# Altium PCB PCB2.PcbDoc (part 2 of 2)
Units mil, origin at the board's own origin, x right, y up, seen from the top; angles counter-clockwise.
Board outline 2024.32 x 2031.2 mil, 4 copper layers (Top Layer, Internal Plane 1, Signal Layer 1, Bottom Layer), stack 46.586 mil thick; 94 components, 65 nets, 310 pads, 967 vias.
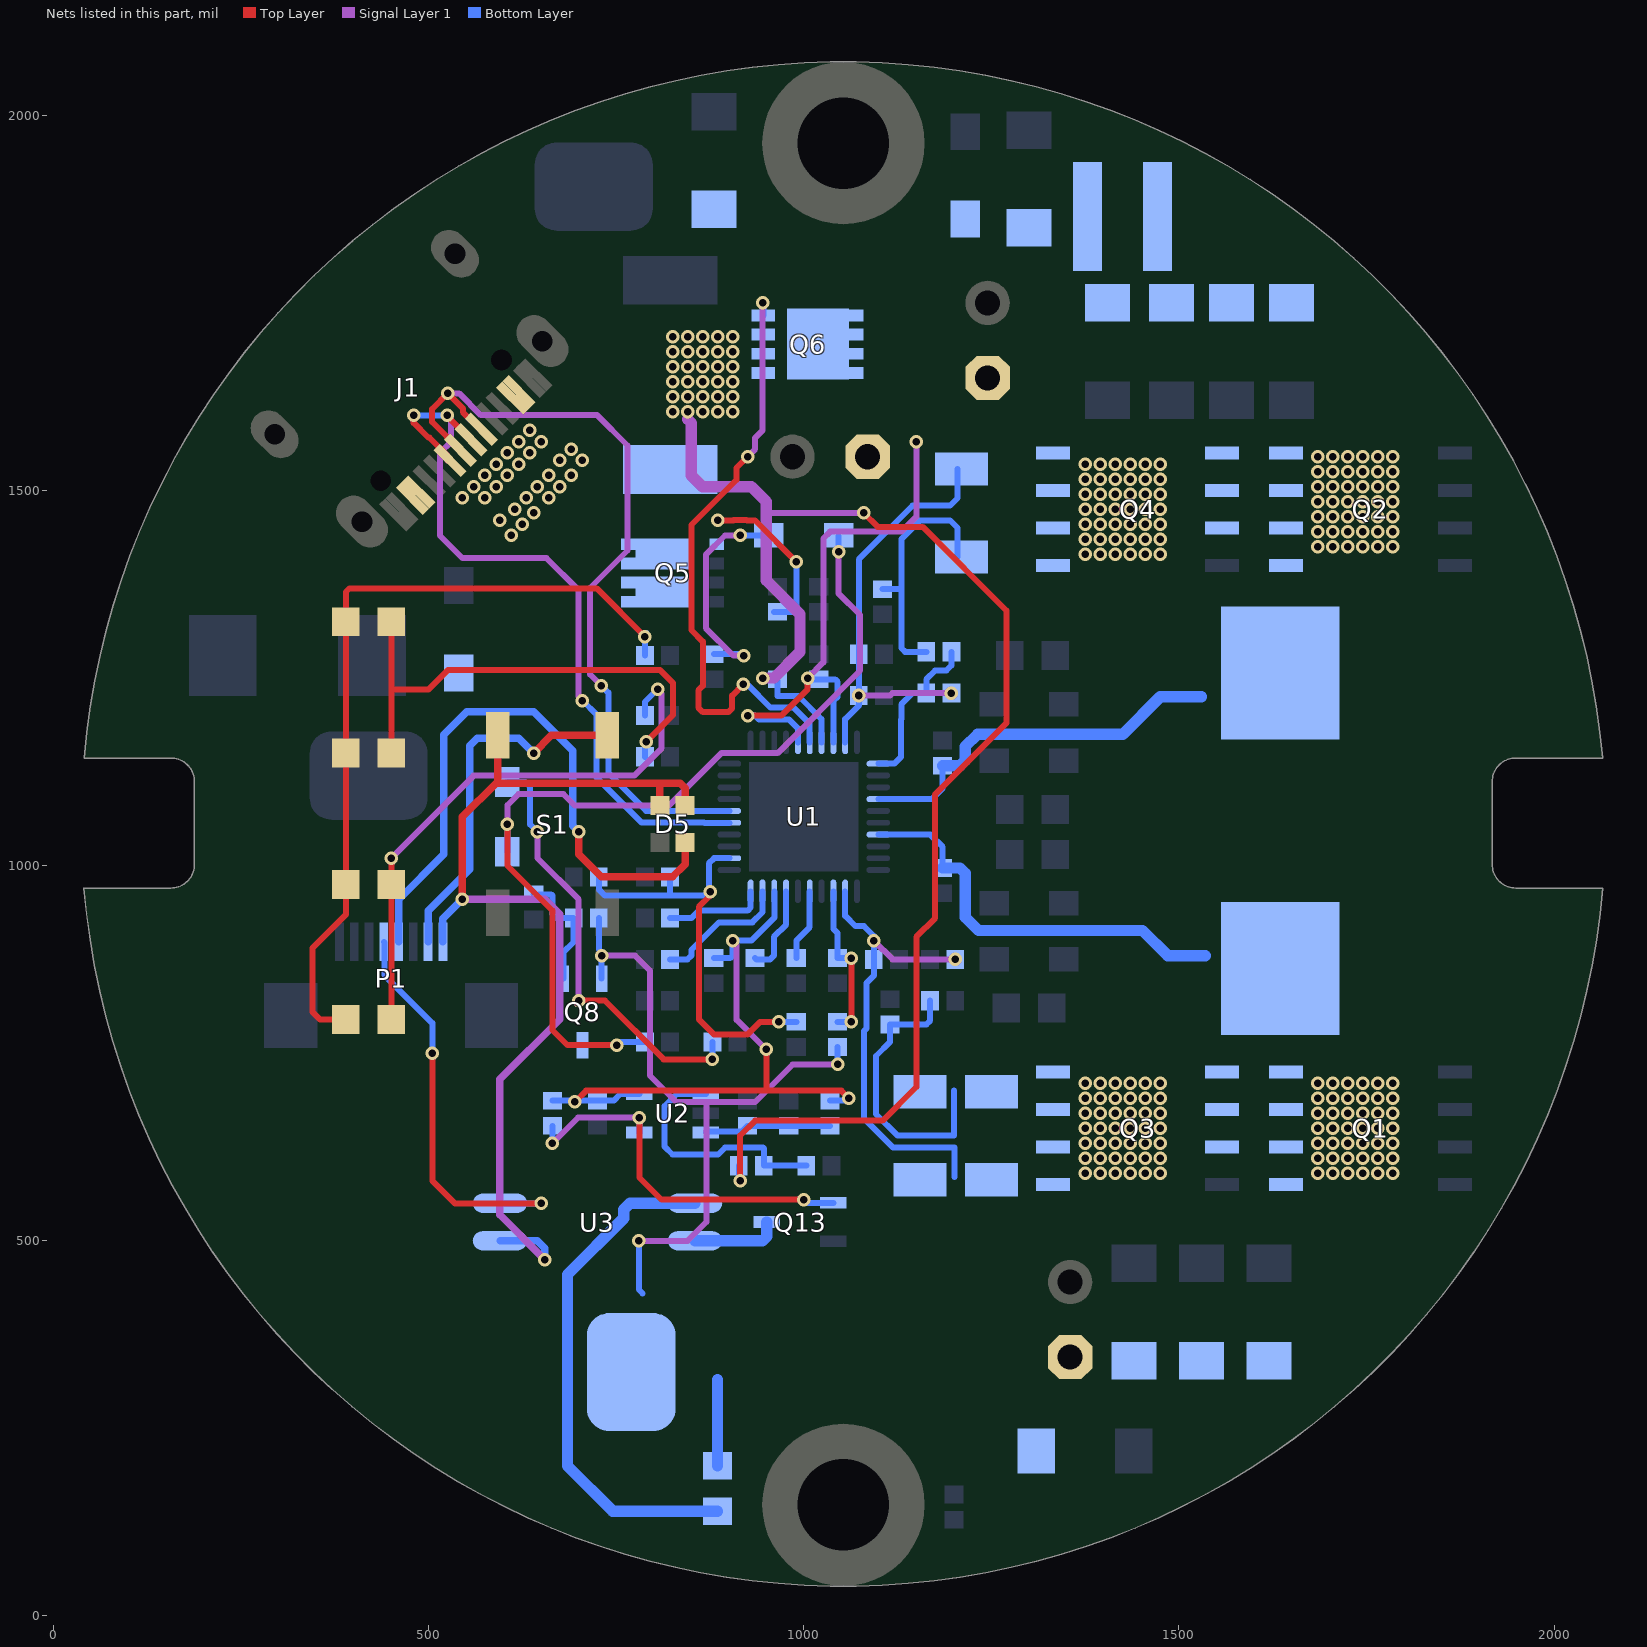
[diagram p4: the nets of this part, all layers, seen from the top]

## Via types
v1: diameter 18, hole 10, Top Layer to Bottom Layer, tented both sides, 967 vias

## Nets (pads, with @x,y where several pads share a name; then routed paths per layer and width w, separated by ;. In a path a pad name is that pad's centre, name@x,y a point inside that pad or via, vN(x,y) a via of type N, cw(c..) or ccw(c..) an arc to the next point about the centre after c; other vN are vias at no path point) (continued)
NetD6_A: D6.A D7.K D8.A D9.K R21.2 | length 1085
  Top Layer w8: D9.K@389.69,795 355,795 345,805 345,890 389.68,934.68 D8.A@389.68,975 D7.K@389.69,1150 389.69,1230 389.68,1320 389.68,1364.68 394.5,1369.5 723.77,1369.5 v1(788.27,1305)
  Bottom Layer w8: R21.2@788.27,1280 v1(788.27,1305) 788.27,1308.27 v1@790,1310
NetD6_K: D6.K D7.A R22.2 | length 676.7
  Top Layer w8: D7.A@450.32,1150 450.31,1235 ; D6.K@450.31,1320 450.31,1235 ; v1(790,1165) 825.5,1200.5 825.5,1243.49 808.49,1260.5 525.5,1260.5 500,1235 450.31,1235
  Bottom Layer w8: R22.2@788.27,1145 788.27,1163.27 v1(790,1165)
NetD8_K: D8.K D9.A R23.2 | length 759
  Top Layer w8: v1(450,1010) 450.31,1009.69 D8.K@450.31,975 D9.A@450.32,795
  Signal Layer 1 w8: v1(450,1010) 560,1120 773.99,1120 810.5,1156.51 810.5,1229.5 v1(805,1235)
  Bottom Layer w8: R23.2@788.27,1200 788.27,1218.27 v1(805,1235)
NetD12_1: D12.1 D13.1 Q8.3 R15.2 | length 1294.2
  Top Layer w8: v1(605,1055) 605,1000 665,940 665,780.71 685,760.71 v1(750.71,760.71)
  Signal Layer 1 w8: v1(605,1055) 605,1080.5 620,1095.5 679.5,1095.5 695,1080 820,1080 890,1150 965,1150 1075,1260 1075,1333.99 1046.46,1362.53 v1(1046.46,1418.54)
  Bottom Layer w8: D12.1@605,1018.54 v1(605,1055) ; Q8.3@705,760.71 v1(750.71,760.71) 755,765 R15.2@788.27,765 ; D13.1@1046.46,1440 v1(1046.46,1418.54) v1@1050,1415
NetD12_2: D12.2 R17.2 | length 581
  Top Layer w8: v1(700,820) 735,820 813.27,741.73 v1(878.27,741.73)
  Signal Layer 1 w8: v1(645,1045) 645,1010 700,955 v1(700,820)
  Bottom Layer w8: D12.2@605,1111.46 628.54,1111.46 635,1105 635,1055 v1(645,1045) ; R17.2@878.27,765 v1(878.27,741.73) v1@880,740
NetD13_2: D13.2 R33.2 | length 298.9
  Signal Layer 1 w8: v1(915,1440) 895,1440 869.5,1414.5 869.5,1316.51 906.01,1280 v1(920,1280)
  Bottom Layer w8: R33.2@880,1281.73 918.27,1281.73 v1(920,1280) ; v1(915,1440) D13.2@953.54,1440
NetQ5_1: Q5.1 R18.2 R32.1 | length 221
  Top Layer w8: v1(885,1460) 906.01,1460 906.51,1460.5 923.49,1460.5 923.99,1460 935,1460 v1(990,1405)
  Bottom Layer w8: R32.1@960,1338.27 983.27,1338.27 990,1345 v1(990,1405)
NetQ5_5: Q5.5 Q5.6
NetQ8_1: Q8.1 R13.1 R14.2 | length 167.5
  Bottom Layer w8: R14.2@640,961.73 663.27,961.73 665,960 665,935 670,930 R13.1@693.27,930 693.27,898.27 679.41,884.41 Q8.1@679.41,849.29
NetQ13_1: Q13.1 R25.1 U2.4 | length 526.6
  Top Layer w8: v1(780.71,664.29) 780.71,584.29 810,555 v1(1000,555)
  Signal Layer 1 w8: v1(665,630) 699.29,664.29 v1(780.71,664.29)
  Bottom Layer w8: v1(665,630) R25.1@665,653.27 ; v1@780,665 v1(780.71,664.29) U2.4@780.71,644.41 ; v1(1000,555) 1004.41,550.59 Q13.1@1039.29,550.59
NetQ13_3: Q13.3 U3.2 | length 117.4
  Bottom Layer w15: U3.2@854.92,500 945,500 950.71,505.71 Q13.3@950.71,525
NetR24_2: R24.2 R26.2 U2.1 | length 336.1
  Bottom Layer w8: U2.1@869.29,695.59 830.59,695.59 814.5,679.5 814.5,625.5 825,615 885.74,615 895.04,624.3 945.7,624.3 946.73,623.27 R24.2@946.73,600 R26.2@1003.27,600
NetR29_2: R29.2 U3.1 | length 696.1
  Bottom Layer w15: U3.1@854.92,550 768.37,550 760,541.63 760,530 685,455 685,200 745.32,139.68 R29.2@885,139.68
NTC: C19.2 R12.2 R20.1 U1.32 | length 587.8
  Top Layer w8: v1(875,965) 875,960 860,945 860,795 880,775 925,775 941.73,791.73 v1(966.73,791.73)
  Bottom Layer w8: C19.2@726.73,985 726.73,968.27 735,960 875,960 873.54,961.46 873.54,1003.04 880.38,1009.88 U1.32@900.79,1009.88 ; 821.73,963.27 R12.2@821.73,985 ; v1@965,790 v1(966.73,791.73) R20.1@990,791.73
PCIN: Q4.5 Q4.6 Q4.7 Q4.8 R3.2 R5.2 R34.2 | length 334.1
  Bottom Layer w8: R5.2@1105,1368.46 1128.51,1368.46 1130,1369.96 ; R34.2@1163.27,1285 1135.04,1285 1130.04,1290 1130.04,1299.33 1130,1299.38 1130,1369.96 ; R3.2@1205,1411.34 1205,1450 1195,1460 1155,1460 1130.04,1435.04 1130.04,1370 1130,1369.96
  other v1: 1375,1415 1395,1415 1415,1415 1435,1415 1455,1415 1475,1415 1375,1435 1395,1435 1415,1435 1435,1435 1455,1435 1475,1435 1375,1455 1395,1455 1415,1455 1435,1455 1455,1455 1475,1455 1375,1475 1395,1475 1415,1475 1435,1475 1455,1475 1475,1475 1375,1495 1395,1495 1415,1495 1435,1495 1455,1495 1475,1495 1375,1515 1395,1515 1415,1515 1435,1515 1455,1515 1475,1515 1375,1535 1395,1535 1415,1535 1435,1535 1455,1535 1475,1535
PCON: Q3.5 Q3.6 Q3.7 Q3.8 R8.1 R30.1 R31.1 R36.2 | length 385
  Bottom Layer w8: R36.2@1168.27,820 1168.27,793.27 1163.27,788.27 R8.1@1115,788.27 1115,765 1096.25,746.25 1096.25,668.75 1125,640 1200,640 1200,700
  other v1: 1375,590 1395,590 1415,590 1435,590 1455,590 1475,590 1375,610 1395,610 1415,610 1435,610 1455,610 1475,610 1375,630 1395,630 1415,630 1435,630 1455,630 1475,630 1375,650 1395,650 1415,650 1435,650 1455,650 1475,650 1375,670 1395,670 1415,670 1435,670 1455,670 1475,670 1375,690 1395,690 1415,690 1435,690 1455,690 1475,690 1375,710 1395,710 1415,710 1435,710 1455,710 1475,710
RBATNUM: R10.2 U1.27 | length 120.4
  Bottom Layer w8: R10.2@935,876.73 936.73,875 955,875 960,880 960,905 976.38,921.38 U1.27@976.38,965.79
RLED: D5.4 P1.4 | length 838.9
  Top Layer w10: v1(700,1045) 700,1015 730,985 825,985 841.73,1001.73 D5.4@841.73,1030.86
  Bottom Layer w10: P1.4@459.84,898.31 459.84,954.84 520,1015 520,1174.5 550.5,1205 640.15,1205 692,1153.15 692,1053 v1(700,1045)
RPSET: R9.2 U1.29 | length 181.6
  Bottom Layer w8: R9.2@821.73,875 845,875 850,880 850,887.6 886.9,924.5 931.42,924.5 944.94,938.02 944.94,965.72 U1.29@944.88,965.79
RVSET: R11.2 U1.30 | length 134.9
  Bottom Layer w8: R11.2@821.73,930 850,930 860,940 925,940 929.13,944.13 U1.30@929.13,965.79
SGND: D5.1 D5.2 P1.1 S1.3 U3.3 | length 1350.9
  Top Layer w10: v1(545,955) 545,1065 590,1110 ; S1.3@592.17,1173.58 592.17,1112.17 590,1110 ; D5.2@808.27,1079.61 808.27,1106.73 805,1110 ; D5.1@841.73,1079.61 841.73,1103.27 835,1110 805,1110 ; 590,1110 805,1110
  Signal Layer 1 w10: v1(545,955) 655,955 675,935 675,795 595,715 595,535 v1(655,475)
  Bottom Layer w10: P1.1@518.9,898.31 518.9,928.9 v1(545,955) ; U3.3@595.08,500 645,500 655,490 v1(655,475)
SW1: C7.1 L2.1 Q2.5 Q2.6 Q2.7 Q2.8 Q4.1 Q4.2 Q4.3 U1.14 | length 516.1
  Bottom Layer w8: U1.14@1099.21,1088.62 1099.33,1088.5 1170.5,1088.5 1185,1103 C7.1@1185,1133.27
  Bottom Layer w15: C7.1@1185,1133.27 1208.27,1133.27 1215,1140 1215,1158.69 1231.31,1175 1425,1175 1475,1225 1530,1225
  other v1: 1685,1425 1705,1425 1725,1425 1745,1425 1765,1425 1785,1425 1685,1445 1705,1445 1725,1445 1745,1445 1765,1445 1785,1445 1685,1465 1705,1465 1725,1465 1745,1465 1765,1465 1785,1465 1685,1485 1705,1485 1725,1485 1745,1485 1765,1485 1785,1485 1685,1505 1705,1505 1725,1505 1745,1505 1765,1505 1785,1505 1685,1525 1705,1525 1725,1525 1745,1525 1765,1525 1785,1525 1685,1545 1705,1545 1725,1545 1745,1545 1765,1545 1785,1545
SW2: C9.1 L2.2 Q1.5 Q1.6 Q1.7 Q1.8 Q3.1 Q3.2 Q3.3 U1.17 | length 553.6
  Bottom Layer w8: U1.17@1099.21,1041.38 1168.62,1041.38 1185,1025 C9.1@1185,996.73
  Bottom Layer w15: C9.1@1185,996.73 1208.27,996.73 1215,990 1215,931.31 1232.64,913.66 1451.34,913.66 1485,880 1535,880
  other v1: 1685,590 1705,590 1725,590 1745,590 1765,590 1785,590 1685,610 1705,610 1725,610 1745,610 1765,610 1785,610 1685,630 1705,630 1725,630 1745,630 1765,630 1785,630 1685,650 1705,650 1725,650 1745,650 1765,650 1785,650 1685,670 1705,670 1725,670 1745,670 1765,670 1785,670 1685,690 1705,690 1725,690 1745,690 1765,690 1785,690 1685,710 1705,710 1725,710 1745,710 1765,710 1785,710
TKEY: P1.2 S1.1 | length 489.8
  Top Layer w10: v1(640,1150) 663.58,1173.58 S1.1@737.83,1173.58
  Bottom Layer w10: P1.2@499.21,898.31 499.21,939.62 555,995.41 555,1160 565,1170 620,1170 v1(640,1150)
TPC_PEAK: C26.2 R34.1 U1.11 | length 221.5
  Bottom Layer w8: U1.11@1099.21,1135.87 1120.57,1135.87 1129.7,1145 1129.7,1195 1130.04,1195.34 1130.04,1215.04 1145,1230 C26.2@1163.27,1230 1163.27,1248.27 1175,1260 1190,1260 1196.73,1266.73 R34.1@1196.73,1285
USBDM: J1.A7 J1.B7 U1.36 | length 1085.7
  Top Layer w8: J1.A7@542.43,1553.7 542.31,1553.7 504.5,1591.51 504.5,1608.49 v1(525.5,1629.5) 545.5,1609.5 545.5,1604.5 568.46,1581.54 J1.B7@570.26,1581.54
  Signal Layer 1 w8: v1(525.5,1629.5) 540.5,1629.5 569.5,1600.5 724.5,1600.5 765,1560 765,1420 715,1370 715,1255 v1(730,1240)
  Bottom Layer w8: v1(730,1240) 739.5,1230.5 739.5,1123.58 789.96,1073.12 873.32,1073.12 873.57,1072.87 U1.36@900.79,1072.87
USBDP: J1.A6 J1.B6 U1.35 | length 1018.4
  Top Layer w8: v1(480,1600) 480,1590 499.45,1570.55 500.96,1570.55 525.3,1546.21 525.3,1539.77 J1.B6@528.5,1539.77 ; v1(525,1600) 525,1598.95 J1.A6@556.34,1567.61
  Signal Layer 1 w8: v1(525,1600) 530,1595 530,1565 515,1550 515,1440 545,1410 656.92,1410 699.5,1367.42 699.5,1225.5 v1(705,1220)
  Bottom Layer w8: v1(480,1600) v1(525,1600) ; v1(705,1220) 724,1201 724,1117.16 783.54,1057.62 866.9,1057.62 867.4,1057.13 U1.35@900.79,1057.13
VBAT: C10.2 C11.2 C12.1 C13.2 C14.2 C15.2 C27.1 FB1.2 pad.3@770,325 Q8.2 R13.2 R29.1 R30.2 R31.2 U1.22 | length 1676.1
  Signal Layer 1 w8: v1(730.59,880) 775,880 795,860 795,720 830,685 870,685 ; v1(780,500) 845,500 870,525 870,685 ; v1(1045,735) 985,735 935,685 870,685 ; v1(1093.27,900) 1118.27,875 v1(1201.73,875)
  Bottom Layer w8: R13.2@726.73,930 726.73,888.27 730.59,884.41 v1(730.59,880) Q8.2@730.59,849.29 ; v1(780,500) 780,435 785,430 ; v1(1045,735) FB1.2@1045,758.27 ; U1.22@1055.12,965.79 1055.12,932.96 1068.58,919.5 1080,919.5 1093.27,906.23 v1(1093.27,900) C15.2@1093.27,875 1093.27,853.27 1083.77,843.77 1083.77,783.24 1080,779.47 1080,698.99 1080.5,698.49 1080.5,662.58 1118.58,624.5 1200.5,624.5 1200.5,585
  Bottom Layer w15: R29.1@885,200.31 885,315
VBIN: C16.2 FB1.1 U1.23 | length 217.8
  Top Layer w8: v1(1063.27,791.73) v1(1063.27,876.73)
  Bottom Layer w8: U1.23@1039.37,965.79 1039.37,915.63 1045,910 C16.2@1045,876.73 v1(1063.27,876.73) v1@1065,875 ; FB1.1@1045,791.73 v1(1063.27,791.73) v1@1065,790
VBULK: C22.2 C23.2 C24.1 D11.2 L1.2 Q6.5 Q6.6 Q6.7 Q6.8
VBUS: C2.2 C3.2 C4.1 C5.2 C6.2 C8.2 C26.1 C30.2 L1.1 R3.1 R4.2 U1.5 U1.8 U1.9 | length 1338.9
  Top Layer w8: v1(925,1200) 970,1200 1005,1235 v1(1005,1250)
  Signal Layer 1 w8: v1(1005,1250) 1025.96,1270.96 1025.96,1427.03 1026.03,1427.11 1026.03,1436.03 1035,1445 1130,1445 1150,1465 v1(1150,1565) ; v1(1073.27,1226.73) 1115,1226.73 1118.27,1230 v1(1196.73,1230)
  Bottom Layer w8: v1(925,1200) 935,1200 940,1195 980,1195 992.13,1182.87 U1.5@992.13,1164.21 ; v1(1005,1250) 1006.73,1248.27 C8.2@1020,1248.27 1041.73,1248.27 1045,1245 1045,1225 1039.37,1219.37 U1.8@1039.37,1164.21 ; U1.9@1055.12,1164.21 1055.12,1195.12 1073.27,1213.27 v1(1073.27,1226.73) C2.2@1073.27,1281.73 1073.27,1408.27 1145,1480 1195,1480 1205,1490 R3.1@1205,1528.66
VBUSG: Q6.4 U1.6 | length 827.5
  Top Layer w8: v1(919.5,1241.56) 904.5,1226.56 904.5,1209.5 899.5,1204.5 865.5,1204.5 859.5,1210.5 859.5,1233.49 865.5,1239.49 865.5,1298.59 850,1314.09 850,1453.99 910,1513.99 910,1530 v1(925,1545)
  Signal Layer 1 w8: v1(925,1545) 935,1555 935,1570 945,1580 v1(945,1750)
  Bottom Layer w8: v1(919.5,1241.56) 924.45,1241.56 955.51,1210.5 986.42,1210.5 1007.87,1189.05 U1.6@1007.87,1164.21 ; v1(945,1750) 945.94,1749.06 Q6.4@945.94,1733.39
VCC5V: C18.1 U1.25 | length 96.5
  Bottom Layer w8: C18.1@990,876.73 990,900 1007.87,917.87 U1.25@1007.87,965.79
VCCIO: C17.1 C20.2 R25.2 R27.1 U1.28 U2.5 | length 884.5
  Top Layer w8: v1(695,685) 710,700 950,700 ; v1(950,755) 950,700 ; v1(1060,690) 1050,700 950,700
  Signal Layer 1 w8: v1(905,900) 910.5,894.5 910.5,794.5 v1(950,755)
  Bottom Layer w8: R25.2@665,686.73 C20.2@725,686.73 746.73,686.73 755.59,695.59 U2.5@780.71,695.59 ; C17.1@880,876.73 901.73,876.73 905,880 v1(905,900) ; v1@910,900.04 930.04,900.04 960.63,930.63 U1.28@960.63,965.79 ; R27.1@1035,686.73 1056.73,686.73 v1(1060,690)
VINOKN: P1.5 U3.4 | length 557.5
  Top Layer w8: v1(505,750) 505,580 535,550 v1(650,550)
  Bottom Layer w8: P1.5@440.16,898.31 440.97,897.49 440.97,854.03 505,790 v1(505,750) ; U3.4@595.08,550 v1(650,550)
VREF: C21.2 R27.2 R28.2 U2.3 | length 169.4
  Bottom Layer w8: U2.3@869.29,644.41 870.38,645.5 917.23,645.5 C21.2@925,653.27 R28.2@980,653.27 R27.2@1035,653.27
VTYPEC: C1.2 D10.2 J1.A4 J1.A9 J1.B4 J1.B9 Q6.1 Q6.2 Q6.3 R24.1 U1.7 | length 2028.8
  Top Layer w8: v1(915,580) 915,640 935,660 1105,660 1150,705 1150,905 1175,930 1175,1095 1270,1190 1270,1340 1158.37,1451.63 1098.37,1451.63 v1(1080,1470)
  Signal Layer 1 w8: 950,1470 v1(1080,1470)
  Signal Layer 1 w15: 845,1595 850,1590 850,1520 865,1505 930,1505 950,1485 950,1470 ; v1(945,1250) 960,1250 995,1285 995,1335 950,1380 950,1477.5
  Bottom Layer w8: R24.1@913.27,600 913.27,581.73 v1(915,580) ; v1(945,1250) 946.73,1248.27 C1.2@965,1248.27 965,1226 992.84,1226 1023.62,1195.22 U1.7@1023.62,1164.21
  other v1: 610,1440 625,1455 595,1460 640,1470 615,1475 545,1490 575,1490 630,1490 660,1490 560,1505 590,1505 645,1505 675,1505 575,1520 605,1520 660,1520 690,1520 590,1535 620,1535 675,1540 705,1540 605,1550 635,1550 690,1555 620,1565 650,1565 635,1580 825,1605 845,1605 865,1605 885,1605 905,1605 825,1625 845,1625 865,1625 885,1625 905,1625 825,1645 845,1645 865,1645 885,1645 905,1645 825,1665 845,1665 865,1665 885,1665 905,1665 825,1685 845,1685 865,1685 885,1685 905,1685 825,1705 845,1705 865,1705 885,1705 905,1705
pads on no net: J1.0 J1.A8 J1.B8 S1.2 S1.4 U1.1 U1.2 U1.3 U1.4 U1.24 U1.40

## Polygon pours and split planes (outlines as drawn)
GND on Bottom Layer "Component Side-No Net 1" (solid, remove dead copper, pour order 53): -135,2110 1935,2110 2010,2185 2225,1970 2225,360 2225,315 1715,-195 1650,-130 -560,-130
GND on Bottom Layer "Component Side-No Net 1" (solid, remove dead copper, pour order 50): 1660,1795 2090,1795 2130,1835 2200,1765 2200,555 2200,505 2125,430 2095,400 1662.65,400
SW2 on Bottom Layer "Component Side-No Net 1" (solid, remove dead copper, pour order 47): 1500,530 1505,535 1505,790 1505,950 1520,965 1525,970 1715,970 1725,970 1735,960 1755,940 1755,840 1795,800 1805,790 1805,505 1550,505
SW1 on Bottom Layer "Component Side-No Net 1" (solid, remove dead copper, pour order 44): 1517.35,1572.65 1525,1565 1817.65,1565 1817.65,1206.83 1810.41,1199.59 1795.81,1185 1770,1185 1745,1185 1735,1175 1735,1165 1735,1155 1520,1155 1520,1562.35 1517.35,1565
GND on Bottom Layer "Component Side-No Net 1" (solid, remove dead copper, pour order 48): 1810,1565 2130,1565 2130,935 2150,915 2125,890 1810,890
VTYPEC on Bottom Layer "Component Side-No Net 1" (solid, remove dead copper, pour order 56): 815,1715 965,1715 965,1580 815,1580
GND on Bottom Layer "Component Side-No Net 1" (solid, remove dead copper, pour order 58): 1265,539.19 1634.19,539.19 1725,630 1735,620 2200,620 2200,15 2295,-80 2160,-215 1250,-215
VTYPEC on Bottom Layer "Component Side-No Net 1" (solid, remove dead copper, pour order 62): 520,1485 590,1415 610,1425 757.35,1572.35 965,1572.35 965,1715 715,1715 700,1700 700,1660
SW1 on Bottom Layer "Component Side-No Net 1" (solid, remove dead copper, pour order 78): 1490,1505 1590,1505 1620,1475 1615,1470 1615,1325 1480,1325 1475,1320
SW2 on Bottom Layer "Component Side-No Net 1" (solid, remove dead copper, pour order 79): 1507.35,685 1515,677.35 1515,550 1545,550 1570,525 1620,525 1620,715 1615,720
PCON on Bottom Layer "Component Side-No Net 1" (solid, remove dead copper, pour order 59): 1110,745 1230,745 1265,780 1360,780 1385,805 1390,810 1510,810 1510,617.55 1521.65,605.91 1522.06,605.49 1522.06,537.07 1302.93,537.07 1295,545 1295,570 1295,655 1290,660 1285,665 1235,665 1120,665 1110,675
VBAT on Bottom Layer "Component Side-No Net 1" (solid, remove dead copper, pour order 60): 1257.6,167.17 1154.77,270 1040,270 935,245 935,235 835,235 705,235 705,445 725,465 730,470 740,480 885,480 890,485 1055,485 1655,485 1705,435 1720,420 1720,150
VBAT on Bottom Layer "Component Side-No Net 1" (solid, remove dead copper, pour order 61): 1265,479.31 1265,505 1295,535 1295,615 1070,615 1060,605 1060,455 1245,455 1267.24,432.76
PCIN on Bottom Layer "Component Side-No Net 1" (solid, remove dead copper, pour order 64): 1185,1445 1160,1445 1155,1445 1140,1430 1140,1350 1145,1345 1175,1345 1190,1345 1200,1335 1230,1305 1330,1305 1520,1305 1525,1310 1525,1565 1265,1565 1265,1470 1265,1445 1220,1445 1220,1420 1185,1420
PCON on Bottom Layer "Component Side-No Net 1" (solid, remove dead copper, pour order 68): 1295,780 1215,780 1195,780 1155,740 1150,735 1150,690 1285,690 1295,680
VTYPEC on Bottom Layer "Component Side-No Net 1" (solid, remove dead copper, pour order 70): 505,1310 505,1230 635,1230 665,1260 715,1310 715,1440 715,1570 710,1575 585,1450 585,1440 585,1360 570,1345 565,1340 505,1340
CH- on Bottom Layer "Component Side-No Net 1" (solid, remove dead copper, pour order 71): 330,1165 330,1340 505,1340 515,1330 515,1070 515,1020 520,1015 365,1015 330,1050
GND on Bottom Layer "Component Side-No Net 1" (solid, remove dead copper, pour order 74): -175,900 -165,910 355,910 355,1025 430,1100 450,1120 450,1250 565,1250 585,1270 661.24,1346.24 722.65,1346.24 722.65,1555.82 920,1753.18 865,1808.18 865,2375 250,2375 15,2140
VBULK on Bottom Layer "Component Side-No Net 1" (solid, remove dead copper, pour order 76): 970,1640 1185,1640 1190,1645 1205,1660 1205,1755 1205,1775 1215,1785 1220,1790 1295,1790 1405,1790 1405,1945 1345,1945 1325,1925 1115,1925 990,1925 970,1905
GND on Bottom Layer "Component Side-No Net 1" (solid, remove dead copper, pour order 80): 830,2235 830,1788 822,1780 902,1700 1205,1700 1305,1700 1335,1670 1335,1410 2120,1410 2135,1395 2240,1500 2240,2200
PCON on Bottom Layer "Component Side-No Net 1" (solid, remove dead copper, pour order 81): 1310,615 1215,615 1215,655 1215,650 1210,655 1185,655 1185,650 1170,650 1135,650 1120,665 1110,675 1105,680 1105,740 1110,745 1205,745 1312.4,745 1332.4,725 1337.4,730 1365,730 1365,635 1350,620
GND on Bottom Layer "Component Side-No Net 1" (solid, remove dead copper, pour order 45): 870,1385 895,1385 895,1395 902.8,1402.8 905,1405 950,1405 950,1393.37 960,1383.37 960,1350 960,1338.27 960,1300 875,1300 870,1305
NetQ5_1 on Bottom Layer "Component Side-No Net 1" (solid, remove dead copper, pour order 55): 895,1420 895,1520 895,1565 887.65,1572.35 760.52,1572.35 757.35,1572.35 717.24,1532.24 715,1530 715,1450 715,1445 850,1445 855,1445 855,1420
NetQ5_5 on Bottom Layer "Component Side-No Net 1" (solid, remove dead copper, pour order 57): 715,1440 852.51,1440 856.27,1443.76 850,1437.49 850,1310 720,1310 715,1315 715,1310
VBULK on Bottom Layer "Component Side-No Net 1" (solid, remove dead copper, pour order 63): 970,1745 965,1750 890,1750 890,1815 845,1815 845,1905 990,1905 990,1760 1005,1745
GND on Bottom Layer "Component Side-No Net 1" (solid, remove dead copper, pour order 67): 810,2030 810,1905 1000,1905 1015,1920 1015,2110 820,2110 815,2105
BAT- on Bottom Layer "Component Side-No Net 1" (solid, remove dead copper, pour order 69): 580,2045 624.04,2000.96 624.04,1678.57 1002.35,1678.57 1018.78,1695 990,1723.78 990,2140
VBULK on Bottom Layer "Component Side-No Net 1" (solid, remove dead copper, pour order 73): 1135,1640 1120,1625 1120,1540 1120,1525 1120,1490 1020,1490 1020,1660 1030,1670 1040,1680 1140,1680
VBUS on Bottom Layer "Component Side-No Net 1" (solid, remove dead copper, pour order 77): 1270.41,1484.59 1270,1485 1215,1485 1215,1520 1190,1520 1195,1520 1195,1500 1195,1495 1190,1490 1185,1490 1125,1490 1120,1495 1120,1570 1120,1805 1165,1850 1400,2085 1440,2085 1495,2085 1635,1945 1725,1855 1765,1855 1765,1665 1710,1610
VTYPEC on Bottom Layer "Component Side-No Net 1" (solid, remove dead copper, pour order 82): 456.07,1447.35 702.65,1447.35 730,1420 718.1,1408.1 718.1,1251.9 706.9,1251.9 635,1180 625,1170 440,1170
CASE on Bottom Layer "Component Side-No Net 1" (solid, remove dead copper, pour order 83): 930,40 935,45 935,305 1119.77,305 1157.94,266.83 1174.77,250 1175,250 1175,150 1180,145 1215,145 1215,25 1210,20 1170,-20 930,-20
VBULK on Bottom Layer "Component Side-No Net 1" (solid, remove dead copper, pour order 85): 965,1700.53 965,1560 980,1545 1035,1545 1030.74,1545 1021.07,1535.33 1020,1534.26 1020,1490 1020,1460 1025,1455 1065,1455 1065,1415 1071.73,1408.27 1073.27,1408.27 1130,1465 1150,1485 1150,1540
GND on Bottom Layer "Component Side-No Net 1" (solid, remove dead copper, pour order 86): 1045,1600 1045,1465 1035,1455 1030,1460 830,1460 830,1570
VTYPEC on Top Layer "Component Side-No Net 1" (solid, remove dead copper, pour order 49): 455,1505 520,1440 535,1425 610,1425 760,1575 760,1650 760,1655 755,1660 700,1660 685,1645 655,1615 645,1615 605,1655 590,1640 590,1635 630,1595 520,1485 510,1485 470,1525 455,1510 455,1505
VTYPEC on Top Layer "Component Side-No Net 1" (solid, remove dead copper, pour order 54): 760,1575 920,1575 925,1580 925,1715 715,1715 700,1700 700,1570
GND on Top Layer "Component Side-No Net 1" (solid, remove dead copper, pour order 65): 95,1725 105,1725 435,1395 700,1660 700,1700 700,2045 665,2080
GND on Top Layer "Component Side-No Net 1" (solid, remove dead copper, pour order 66): 425,1400 585,1560 835,1560 1015,1560 1145,1430 1250,1325 1250,65 2180,65 2225,20 2520,315 2520,1780 2520,2390 2440,2470 2435,2465 45,2465
GND on Top Layer "Component Side-No Net 1" (solid, remove dead copper, pour order 75): -25,1390 -10,1405 460,1405 460,1415 725,1680 690,1715 690,1860 210,1860 160,1910
GND on Top Layer "Component Side-No Net 1" (solid, remove dead copper, pour order 52): -175,560 1565,260 1665,160 1620,115 1620,-60 555,-60
GND on Top Layer "Component Side-No Net 1" (solid, remove dead copper, pour order 84): 1060,1645 1060,1480 1045,1465 1035,1475 800,1475 800,1590 825,1615
GND on Top Layer "Component Side-No Net 1" (solid, remove dead copper, pour order 46): -65.5,1636.82 1471.77,1636.82 1529.3,1579.3 1517.79,1567.8 1517.79,216.03 -75.56,216.03 -88.51,228.97
VTYPEC on Signal Layer 1 "Component Side-No Net 1" (solid, remove dead copper, pour order 72): 440,1660 455,1645 785,1645 785,1365 795,1355 770,1330 440,1330
GND on Signal Layer 1 "Component Side-No Net 1" (solid, remove dead copper, pour order 51): 178.77,2240.64 201.7,2217.71 2142.96,2217.71 2142.96,1927.28 2262.69,1807.55 2293.26,1776.98 2293.26,263.71 1949.34,263.71 1528.99,-156.64 1503.51,-131.16 -228.84,-131.16 -228.84,1537.5 -315.46,1624.12
VTYPEC on Internal Plane 1 (split plane): 924.9,1712.89 924.9,1597.11 912.89,1585.1 785,1585.1 783.05,1584.71 781.4,1583.6 622.89,1425.1 577.11,1425.1 512.21,1490 652.11,1629.9 665,1629.9 666.95,1630.29 668.6,1631.4 762.11,1724.9 912.89,1724.9
GND on Internal Plane 1 (split plane): 285 vertices, not listed, extent 62.53,59.72 2042.7,2051.21

## Keep-outs
Keep-Out Layer:
  the board outline again, w10

## Other copper
Top Layer:
  rectangle net PCIN: 1360,1405 1485,1545
  rectangle net SW1: 1670,1415 1795,1555
  rectangle net SW2: 1675,575 1795,720
  rectangle net PCON: 1365,575 1485,720
  rectangle net GND: 945,1010 1055,1120
  rectangle net GND: 1175,1700 1330,1805
  rectangle net GND: 1235,395 1470,510
Signal Layer 1:
  rectangle net VTYPEC: 810,1590 925,1720
  rectangle net SW2: 1675,575 1795,720
  rectangle net PCON: 1365,575 1485,720
  rectangle net SW1: 1670,1415 1795,1555
  rectangle net PCIN: 1365,1405 1485,1545
  rectangle net GND: 1265,390 1425,495
  rectangle net GND: 1160,1695 1350,1820
Bottom Layer:
  rectangle net GND: 285,690 350,890
  rectangle net GND: 550,740 620,870
  rectangle net GND: 525,760 640,840
  pour cut-out: 1373.64,905 1700,970 1700,1150 1373.64,1200
Internal Plane 1 (plane layer: these items are gaps in the copper):
  lines w10: 505,1490 650,1635 665,1635 760,1730 915,1730 930,1715 930,1595 915,1580 785,1580 625,1420 575,1420 505,1490

## Silkscreen, mask and mechanical layers (free items; w line width, h text height)
Top Overlay:
  text "+" at 1155,1670 h88.58 r270
  text "+" at 1061.49,1622.03 h88.58 r270
  text "Type-C" at 545,1400 h88.58 r45
  text "100" at 285,1390 h88.58 r270
  text "75" at 285,1190 h88.58 r270
  text "STAT" at 845,1115 h88.58 r90
  text "Redstoner_35" at 1310,1080 h118.11 r90
  text "50" at 300,1015 h88.58 r270
  text "Ver 1.0D" at 1655,895 h88.58 r90
  text "2026/08/13" at 1715,865 h88.58 r90
  text "25" at 285,835 h88.58 r270
  text "Wake" at 560,835 h88.58
  text "FLBM3-TCCHG" at 1590,805 h88.58 r90
  text "Key" at 590,770 h88.58
  text "Designed By:" at 1305,540 h100 r90
  text "DFEx-FloodBeaMon3tr" at 1215,535 h157.48 r90
  text "+" at 1265,365 h88.58 r270
Bottom Overlay:
  rectangle: 355,430 535,655
  rectangle: 850,1330 870,1450
  lines w10: 770,1730 770,1585 1190,1585 ; 880,370 880,470 ; 885,280 905,280 1300,280 ; 925,1820 1190,1820 ; 1100,515 1305,515
  text "BAT-" at 590,1780 h88.58 r270
  text "470uF" at 1110,1765 h72.83
  text "TYPE-C" at 520,1760 h72.83 r45
  text "35V" at 790,1605 h72.83 r270
  text "2.5" at 1250.03,1445.26 h72.83
  text "250V" at 330,1420 h72.83
  text "F20A" at 330,1360 h72.83
  text "PIN" at 1215,1325 h55
  text "HG1" at 1350,1325 h55
  text "L028" at 1980,1310 h78.74 r90
  text "JLCJLCJLCJLC" at 1450,1270 h70 r90
  text "抄板没鸡鸡哦" at 1840,1225 h70 r90
  text "的保险丝！" at 590,1210 h70 r270
  text "10uH" at 1560,1125 h70 r90
  text "LG" at 1230,1040 h70
  text "请按原规格替换损坏" at 670,1025 h70 r270
  text "PV" at 800,1025 h72.83 r270
  text "CHG-" at 500,995 h88.58
  text "(to BALMB)" at 260,965 h88.58 r90
  text "L028" at 1980,945 h78.74 r90
  text "n" at 920,915 h72.83 r270
  text "JBAL" at 190,865 h88.58 r90
  text "HG2" at 1145,775 h55 r180
  text "5" at 1130,625 h72.83 r270
  text "4" at 1225,625 h72.83 r270
  text "470uF" at 1300,495 h72.83 r90
  text "BATCHG" at 355,410 h72.83 r180
  text "25V" at 1095,395 h72.83
  text "FlBM3" at 440,345 h72.83 r180
  text "BAT+" at 650,245 h88.58 r270
  text "烫烫屯" at 1420,125 h72.83
Top Solder:
  rectangle: 1365,575 1485,720
  rectangle: 1675,575 1795,720
  rectangle: 1670,1415 1795,1555
  rectangle: 1360,1405 1485,1545
  rectangle: 945,1010 1055,1120
Bottom Solder:
  rectangle: 1530,1440 1560,1560
  rectangle: 1840,1440 1870,1560
  rectangle: 1840,615 1870,735
  rectangle: 1530,615 1560,735
  rectangle: 1531.26,1795 1610,1873.74
  rectangle: 1130,555 1275,585
  rectangle: 930,1650 960,1715
  lines w59.06: 875,330 1125,330 1195,400 1195,555 ; 1040,1695 1120,1695 1150,1725 1150,1820 1190,1860 1210,1860 ; 1205,1540 1205,1585 1270,1650 1275,1650 1330,1705 1330,1740
Mechanical 1:
  circle w10: c1052.59,1962.94 r59.06
  circle w10: c1052.62,147.99 r59.84
  lines w10: 214.89,1652.71 455.42,1893.23 660.03,1688.62 425.51,1454.28 214.89,1652.71 ; 1490,905 1700,905 1700,1200 1490,1200 1490,905

## Text inside footprints (layer, text, board x,y; h text height)
C4: Bottom Overlay "+" at 1270,1575 h50 r270
C12: Bottom Overlay "+" at 1310,295 h50 r270
C24: Bottom Overlay "+" at 1135,1500 h50
L2: Bottom Overlay "CSBX1275" at 1500,1175 h55 r90